# Altium PCB PCB1.PcbDoc
Units mil, origin at the board's own origin, x right, y up, seen from the top; angles counter-clockwise.
Board outline 6000 x 4000 mil, 2 copper layers (Top Layer, Bottom Layer); 22 components, 14 nets, 75 pads, 55 vias.
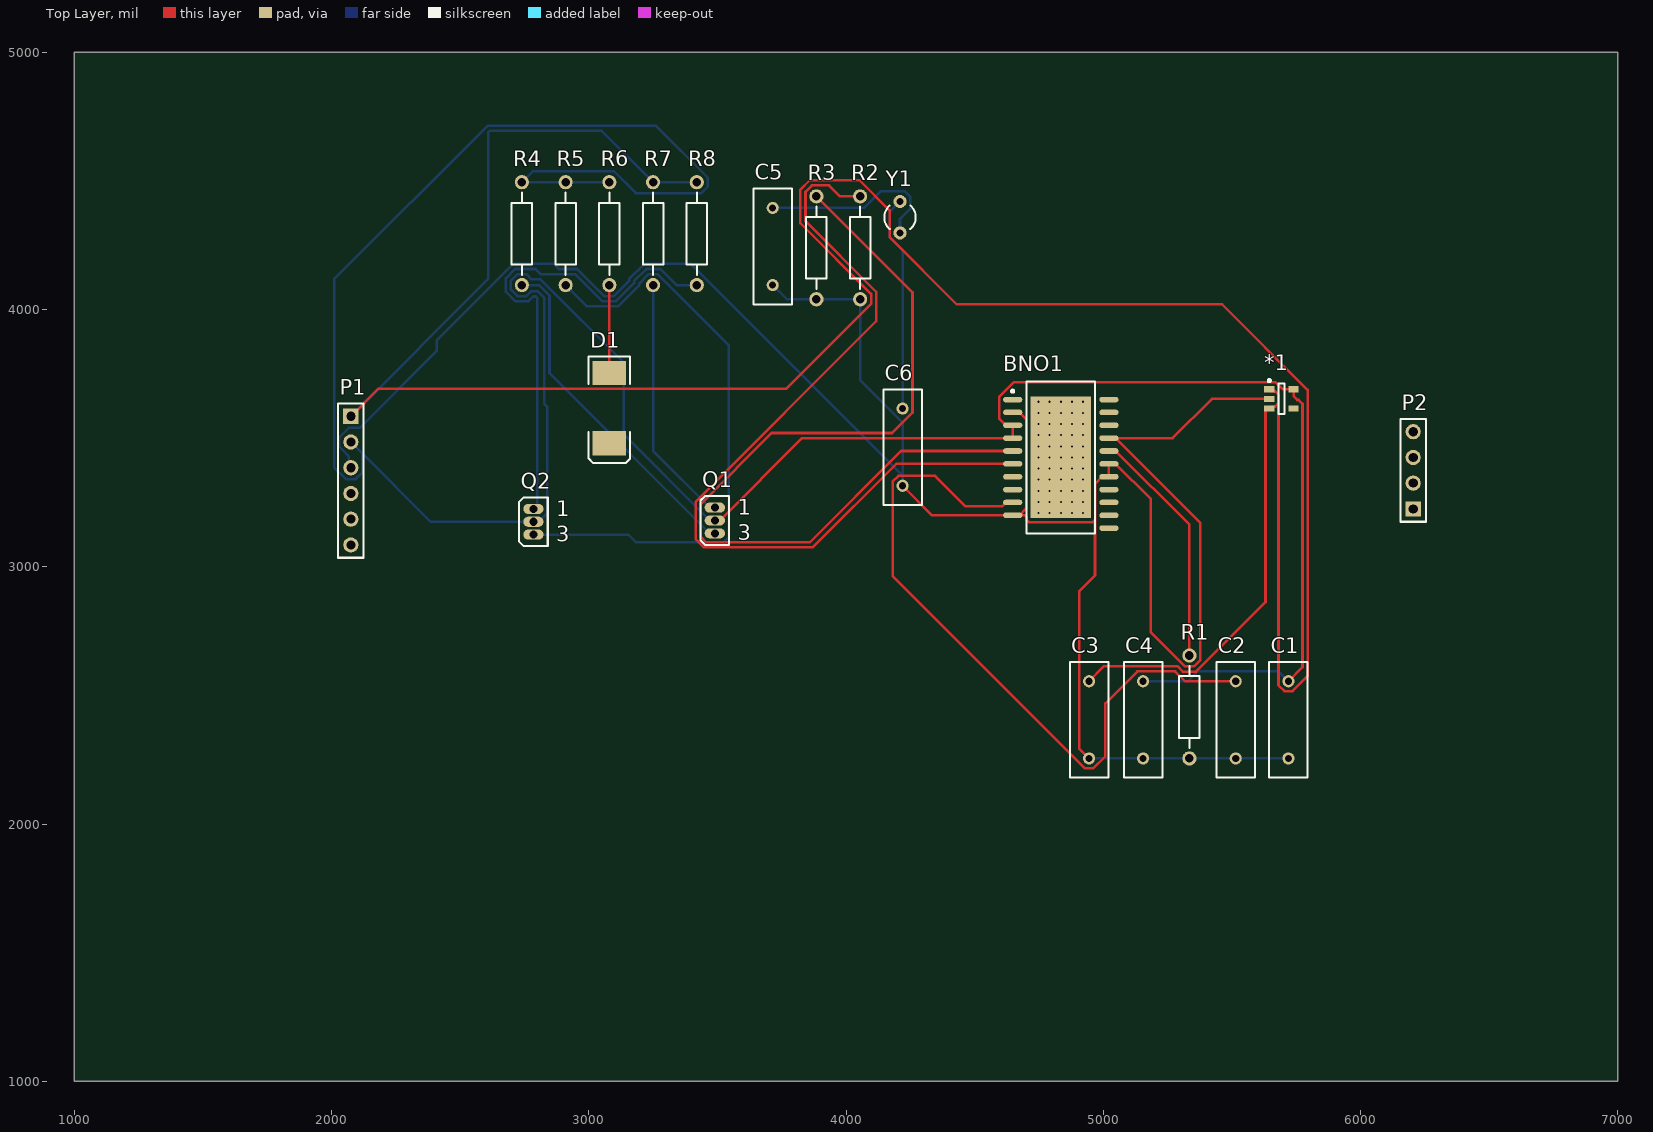
[diagram p0: Top Layer view]
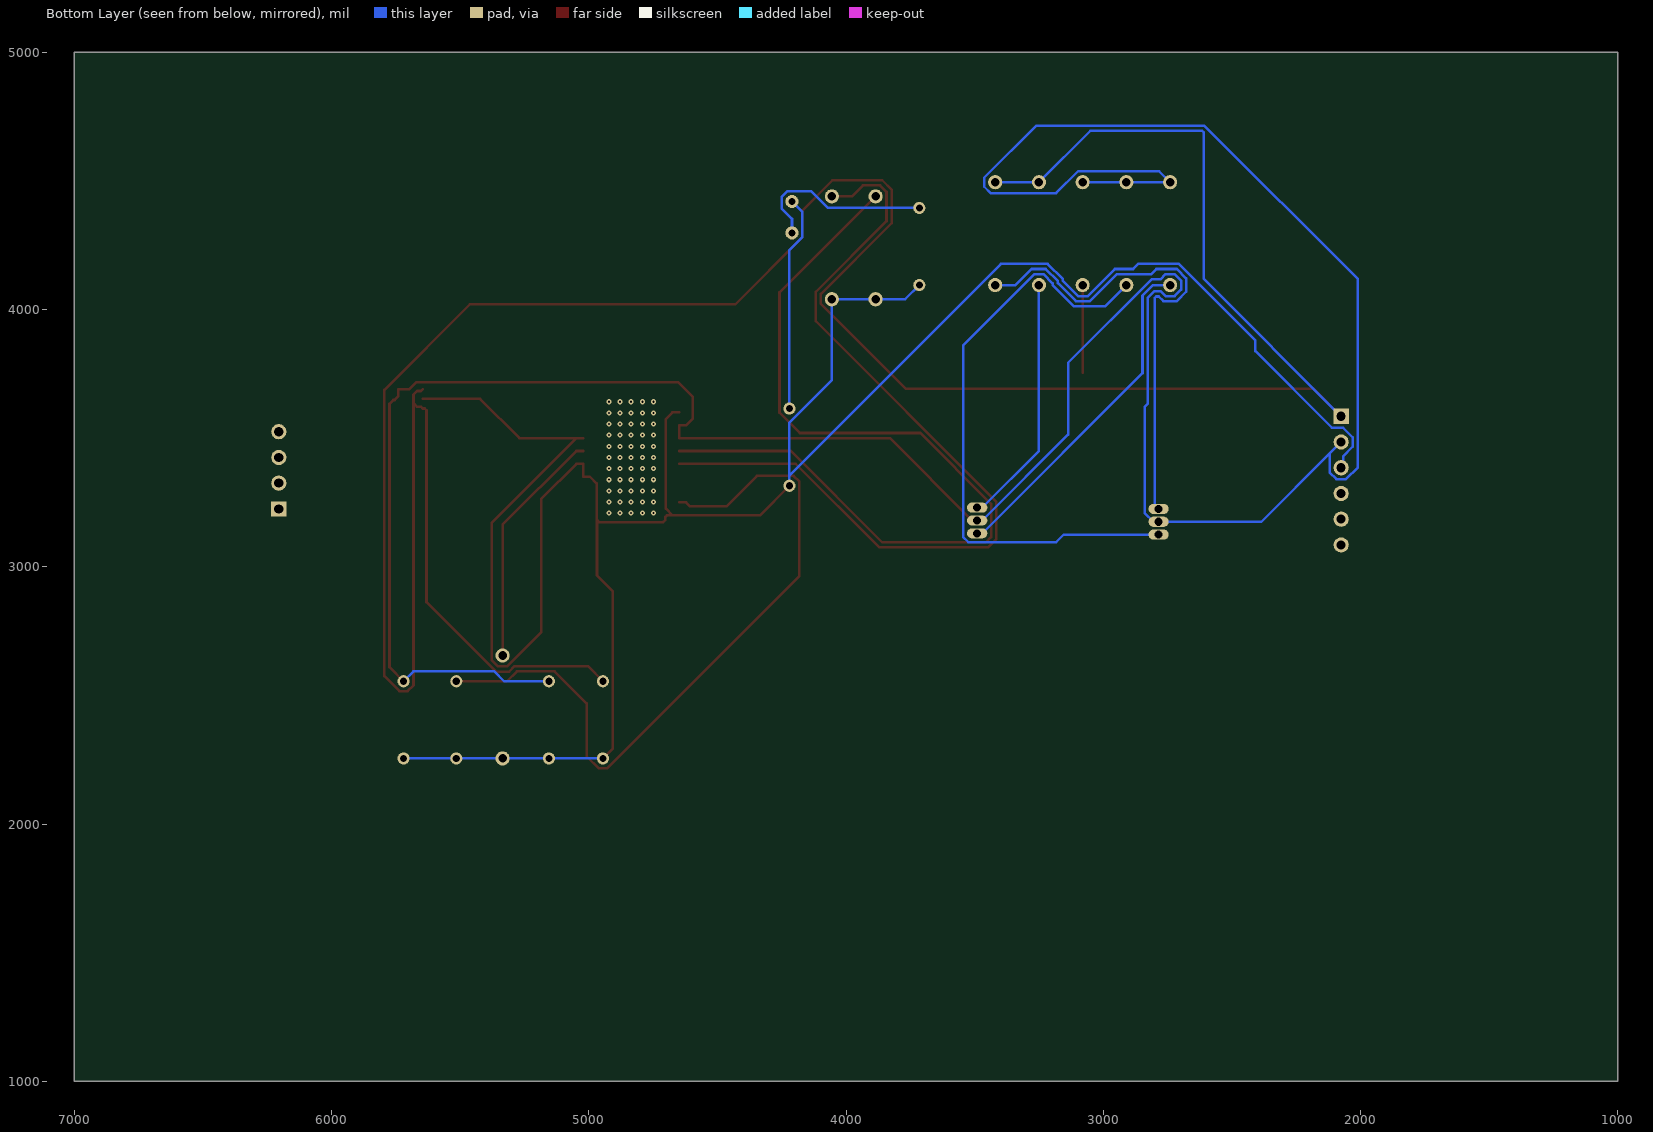
[diagram p1: Bottom Layer view, seen from below]

## Layer stack, top to bottom
Top Solder: solder mask 0.4, Solder Resist, Dk 3.5
Top Layer: signal copper 1.4
Dielectric 1: dielectric 12.6, FR-4, Dk 4.8
Bottom Layer: signal copper 1.4
Bottom Solder: solder mask 0.4, Solder Resist, Dk 3.5

## Board outline
1000,1000 7000,1000 7000,5000 1000,5000

## Design rules (kind name [scope] priority, off if disabled: settings)
Clearance [All] p1: gap=10 ignorepadtopadclearanceinfootprint=FALSE except(0: Arc-Hole Track-Hole SMDPad-Hole THPad-Hole Via-Hole Fill-Hole Poly-Hole Region-Hole Text-Hole)
MinimumSolderMaskSliver [All] p1: minsoldermaskwidth=1
PolygonConnect [All] p1: connectstyle=Relief reliefconductorwidth=10 reliefentries=4 polygonreliefangle="90 Angle" airgapwidth=10
RoutingVias [All] p1: holewidth=28 width=50 viastyle="Through Hole" minholewidth=28 minwidth=50 maxholewidth=28 maxwidth=50
SilkToSolderMaskClearance [IsPad] p1: minsilkscreentomaskgap=5 clearancetoexposedcopper=TRUE
SolderMaskExpansion [All] p1: expansion=4 istentingtop=FALSE
Width [All] p1: maxlimit=10 minlimit=10 preferedwidth=10
28 further rules are at their usual default settings.

## Components (designator, comment, footprint, x,y, rotation, side; value= is the part's Value field where it differs from the comment)
*1 "voltageRegulator" SOT95P245X110-5N 5692.76,3652.6 r0 top
BNO1 "BNO055" SOIC127P980X95_HS-22N 4835,3425 r0 top
C1 "" RAD-0.3 5720,2405 r90 top value=0.1uF
C2 "" RAD-0.3 5515,2405 r90 top value=0.1uF
C3 "" RAD-0.3 4945,2405 r90 top value=10uF
C4 "" RAD-0.3 5155,2405 r90 top value=10uF
C5 "" RAD-0.3 3715,4245 r90 top value=22pF
C6 "" RAD-0.3 4220,3465 r90 top value=22pF
D1 "Diode" SMC 3080,3616.81 r270 top
P1 "Header 6" HDR1X6 2075,3585 r270 top
P2 "Header 4" HDR1X4 6205,3225 r90 top
Q1 "MOSFET-N" E3 3490,3180 r0 top
Q2 "MOSFET-N" E3 2785,3175 r0 top
R1 "" AXIAL-0.4 5335,2455 r90 top value=10K
R2 "" AXIAL-0.4 4055,4240 r90 top value=10K
R3 "" AXIAL-0.4 3885,4240 r90 top value=10K
R4 "" AXIAL-0.4 2740,4295 r90 top value=10K
R5 "" AXIAL-0.4 2910,4295 r90 top value=10K
R6 "" AXIAL-0.4 3080,4295 r90 top value=10K
R7 "" AXIAL-0.4 3250,4295 r90 top value=10K
R8 "" AXIAL-0.4 3420,4295 r90 top value=10K
Y1 "32.768KHz" R38 4210,4358.98 r0 top

## Footprints (in the part's own frame and the unit in brackets; to place one, negate y for a bottom-side part, rotate by r counter-clockwise, add the part's x,y. Pads: shape width x height; smd on the part's side, far side on the other; paste and mask are expansions set on the pad)
AXIAL-0.4 [mm] "Axial Device, Thru-Hole; 2 Leads; 0.4 in Pin Spacing"
  round 1.4 hole 0.85: 1(-5.08,0) 2(5.08,0)
  silkscreen extent -4.06,-1.02 4.06,1.02
E3 [mm] "TO, Flat Index; 3 In-Line, Axial Leads; Body Dia. 4.6mm; Lead Dia. 0.5 mm (max)"
  oval 2x1 hole 0.8: 1(0,1.27) 2(0,0) 3(0,-1.27)
  silkscreen extent -1.41,-2.41 1.41,2.41
HDR1X4 [mm] "Connector; Header; 4 Position"
  rect 1.5x1.5 hole 0.9: 1(0,0)
  round 1.5 hole 0.9: 2(2.54,0) 3(5.08,0) 4(7.62,0)
  silkscreen extent -1.27,-1.27 8.89,1.27
HDR1X6 [mm] "Connector; Header; 6 Position"
  rect 1.5x1.5 hole 0.9: 1(0,0)
  round 1.5 hole 0.9: 2(2.54,0) 3(5.08,0) 4(7.62,0) 5(10.16,0) 6(12.7,0)
  silkscreen extent -1.27,-1.27 13.97,1.27
R38 [mm] "Crystal, Thru-Hole; 2 Leads; Body 3.1 x 8.2 mm (Dia.xH)"
  round 1.3 hole 0.7: 1(0,1.55) 2(0,-1.55)
  silkscreen extent -1.55,-1.19 1.55,1.17
RAD-0.3 [mm] "Radial Cap, Thru-Hole; 2 Leads; 0.3 in Pin Spacing"
  round 1.2 hole 0.7: 1(-3.81,0) 2(3.81,0)
  silkscreen extent -5.71,-1.91 5.71,1.91
SMC [mm] "DO-214-AB/SMC; 2 C-Bend Leads; Body 7.9 x 5.9 mm, inc. leads (LxW)"
  rect 2.4x3.3 smd: 1(-3.475,0) 2(3.475,0)
  silkscreen extent -5.07,-2.05 5.43,2.05
SOIC127P980X95_HS-22N [mm] "SOIC, 21-Leads, Body 13.50x7.30mm, Pitch 1.27mm, Thermal Pad 12.00x6.00mm, IPC Medium Density"
  oval 1.9x0.55 smd: 1(-4.75,5.715) 2(-4.75,4.445) 3(-4.75,3.175) 4(-4.75,1.905) 5(-4.75,0.635) 6(-4.75,-0.635) 7(-4.75,-1.905) 8(-4.75,-3.175) 9(-4.75,-4.445) 10(-4.75,-5.715) 11(4.75,-6.985) 12(4.75,-5.715) 13(4.75,-4.445) 14(4.75,-3.175) 15(4.75,-1.905) 16(4.75,-0.635) 17(4.75,0.635) 18(4.75,1.905) 19(4.75,3.175) 20(4.75,4.445) 21(4.75,5.715)
  rect 6x12 smd: 22(0,0)
  silkscreen extent -4.87,-7.5 3.4,7.5, body extent -4.91,-7.5 4.91,7.5, height 1.05
SOT95P245X110-5N [mm] "SOT23, 5-Leads, Body 2.90x2.45mm, Pitch 0.95mm, IPC Medium Density"
  rect 1x0.6 smd: 1(-1.2,0.95) 2(-1.2,0) 3(-1.2,-0.95) 4(1.2,-0.95) 5(1.2,0.95)
  silkscreen extent -1.32,-1.5 0.3,1.92, body extent -1.3,-1.5 1.3,1.5, height 1.1

## Part data
C1 C2 C3 C4 C5 C6: library part Cap, "Capacitor", LatestRevisionDate=17-Jul-2002, LatestRevisionNote="Re-released for DXP Platform.", PackageDescription="Radial Cap, Thru-Hole; 2 Leads; 0.3 in Pin Spacing", PackageReference=RAD-0.3, Published=8-Jun-2000, Publisher="Altium Limited"
D1: "Default Diode", Code_JEDEC=DO-214-AB, LatestRevisionDate=17-Jul-2002, LatestRevisionNote="Re-released for DXP Platform.", PackageDescription="DO-214-AB/SMC; 2 C-Bend Leads; Body 7.9 x 5.9 mm, inc. leads (LxW)", PackageReference=SMC, PackageVersion=Sep-1996, Published=8-Jun-2000, Publisher="Altium Limited"
P1: "Header, 6-Pin", LatestRevisionDate=17-Jul-2002, LatestRevisionNote="Re-released for DXP Platform.", Publisher="Altium Limited"
P2: "Header, 4-Pin", LatestRevisionDate=17-Jul-2002, LatestRevisionNote="Re-released for DXP Platform.", Publisher="Altium Limited"
Q1 Q2: "N-Channel MOSFET", LatestRevisionDate=17-Jul-2002, LatestRevisionNote="Re-released for DXP Platform.", PackageDescription="TO, Flat Index; 3 In-Line, Axial Leads; Body Dia. 4.6mm; Lead Dia. 0.5 mm (max)", PackageReference=E3, PackageVersion=1995/1996, Published=8-Jun-2000, Publisher="Altium Limited"
R1 R2 R3 R4 R5 R6 R7 R8: library part Res2, "Resistor", LatestRevisionDate=17-Jul-2002, LatestRevisionNote="Re-released for DXP Platform.", PackageDescription="Axial Device, Thru-Hole; 2 Leads; 0.4 in Pin Spacing", PackageReference=AXIAL-0.4, Published=8-Jun-2000, Publisher="Altium Limited"
Y1: library part XTAL, "Crystal Oscillator", LatestRevisionDate=17-Jul-2002, LatestRevisionNote="Re-released for DXP Platform.", PackageDescription="Crystal, Thru-Hole; 2 Leads; Body 3.1 x 8.2 mm (Dia.xH)", PackageReference=R38, Published=8-Jun-2000, Publisher="Altium Limited"

## Via types
v1: diameter 19.68, hole 7.87, Top Layer to Bottom Layer, 55 vias

## Nets (pads, with @x,y where several pads share a name; then routed paths per layer and width w, separated by ;. In a path a pad name is that pad's centre, name@x,y a point inside that pad or via, vN(x,y) a via of type N, cw(c..) or ccw(c..) an arc to the next point about the centre after c; other vN are vias at no path point)
3.3V: *1.5 BNO1.3 BNO1.4 C1.2 C4.2 P1.2 Q1.2 Q2.2 R4.2 R5.2 R6.2 | length 11632
  Top Layer w10: Q1.2 3509.68,3180 3829.68,3500 BNO1.4 BNO1.3 4621.42,3550 4595.59,3575.83 4595.59,3660.7 4651.7,3716.81 5671.41,3716.81 5698.22,3690 *1.5 5740,3663.19 5754.98,3648.2 5759.7,3648.2 5774.69,3633.22 5774.69,2609.69 C1.2
  Bottom Layer w10: P1.2 2119.53,3440.47 ; R6.2 R5.2 R4.2 2782.56,4537.56 3097.63,4537.56 3182.75,4452.44 3437.63,4452.44 3462.56,4477.37 3462.56,4512.63 3260.19,4715 2607.57,4715 2010.47,4117.9 2010.47,3386.56 2056.56,3340.47 2093.44,3340.47 2119.53,3366.56 2119.53,3440.47 ; Q1.2 3470.32,3180 3136.29,3514.03 3136.29,3793.12 2811.85,4117.56 2777.63,4117.56 2757.63,4137.56 2722.37,4137.56 2697.44,4112.63 2697.44,4077.37 2722.37,4052.44 2757.63,4052.44 2775.92,4070.73 2802.11,4070.73 2827.44,4045.4 2827.44,3633.51 2839.37,3621.58 2839.37,3209.69 2804.68,3175 2385,3175 2119.53,3440.47 ; C4.2 5328.73,2555 5367.35,2593.62 5681.38,2593.62 C1.2
+5: *1.1 *1.3 C3.2 P1.1 R7.2 R8.2 | length 11440
  Top Layer w10: P1.1 2181.38,3691.38 3766.57,3691.38 4097.56,4022.37 4097.56,4060.26 3822.44,4335.38 3822.44,4465.91 3859.09,4502.56 4052.63,4502.56 4169.41,4385.78 4169.41,4281.14 4430.04,4020.51 5462.2,4020.51 5794.69,3688.02 5794.69,2575.07 5736,2516.38 5704,2516.38 5681.38,2539 5681.38,3634.57 5681.38,3669.44 5667.63,3683.19 5652.32,3683.19 *1.1 ; C3.2 5003.62,2613.62 5287.91,2613.62 5309.09,2592.44 5360.91,2592.44 5630.83,2862.35 5630.83,3608.39 5637.64,3615.2 *1.3 5652.32,3622.01 5667.63,3622.01 5680.2,3634.57
  Bottom Layer w10: P1.1 2610,4120 2610,4689.14 2615.86,4695 3050,4695 R7.2 R8.2
GND: *1.2 BNO1.2 BNO1.10 BNO1.15 BNO1.16 BNO1.18 C1.1 C2.1 C3.1 C4.1 C5.1 C6.1 P1.3 R1.1 R2.1 R3.1 | length 10180.8
  Top Layer w10: C6.1 4335,3200 BNO1.10 BNO1.10@4674.57,3200 ; BNO1.2 4674.57,3600 4700.39,3574.17 4700.39,3225.83 BNO1.10@4674.57,3200 ; C3.1 4906.38,2293.62 4906.38,2904.35 4968.11,2966.08 4968.11,3182.57 ; BNO1.18 BNO1.18@5048.58,3500 ; *1.2 5422.1,3652.6 5269.5,3500 BNO1.18@5048.58,3500 ; BNO1.10@4674.57,3200 4696.03,3200 4701.89,3194.14 4701.89,3182.57 4710.68,3173.78 4959.32,3173.78 4968.11,3182.57 ; 4968.11,3182.57 4969.61,3184.06 4969.61,3324.17 4995.43,3350 BNO1.15 BNO1.16 5048.58,3400 5184.09,3264.49 5184.09,2745.72 5317.37,2612.44 5352.63,2612.44 5377.56,2637.37 5377.56,3171.02 BNO1.18@5048.58,3500
  Bottom Layer w10: P1.3 2067.5,3392.5 2067.5,3429.53 2030.47,3466.56 2030.47,3503.44 2067.5,3540.47 2110.74,3540.47 2408.27,3838 2408.27,3880.03 2705.8,4177.56 2864.09,4177.56 2884.09,4157.56 2954.87,4157.56 3059.99,4052.44 3097.63,4052.44 3156.72,4111.53 3156.72,4118.47 3215.8,4177.56 3397.63,4177.56 4220,3355.19 ; C5.1 3770,4040 R3.1 R2.1 4055,3725.38 4220,3560.38 4220,3355.19 ; C6.1 4220,3355.19 ; C3.1 C4.1 R1.1 C2.1 C1.1
NetBNO1_5: BNO1.5 R3.2 | length 3462.1
  Top Layer w10: R3.2 4258.62,4066.38 4258.62,3599 4179.62,3520 3711.26,3520 3435.63,3244.37 3435.63,3115.63 3455.95,3095.32 3859.76,3095.32 4214.45,3450 BNO1.5
NetBNO1_6: BNO1.6 R2.2 | length 3375.6
  Top Layer w10: R2.2 3976.36,4440 3933.8,4482.56 3867.37,4482.56 3842.44,4457.63 3842.44,4343.66 4117.56,4068.55 4117.56,3954.58 3415.63,3252.65 3415.63,3107.35 3447.66,3075.32 3870.62,3075.32 4195.31,3400 BNO1.6
NetBNO1_9: BNO1.9 C2.2 | length 2834.5
  Top Layer w10: BNO1.9 4621.42,3250 4606.42,3235 4464.52,3235 4345.9,3353.62 4204,3353.62 4181.38,3331 4181.38,2964 4929,2216.38 4961,2216.38 5008.04,2263.42 5008.04,2469.33 5132.34,2593.62 5279.62,2593.62 5318.24,2555 C2.2
NetBNO1_17: BNO1.17 R1.2 | length 940.2
  Top Layer w10: BNO1.17 5048.58,3450 5335,3163.58 R1.2
NetBNO1_26: C6.2 Y1.1 | length 842.8
  Bottom Layer w10: Y1.1 4169.41,4379.41 4169.41,4281.14 4220,4230.55 C6.2
NetBNO1_27: C5.2 Y1.2 | length 728.3
  Bottom Layer w10: C5.2 4070.19,4395 4135.78,4460.59 4226.81,4460.59 4250.59,4436.81 4250.59,4393.25 4210,4352.66 Y1.2
NetD1_1: D1.1 R6.1 | length 341.4
  Top Layer w10: D1.1 R6.1
NetQ1_1: Q1.1 R7.1 | length 975.9
  Bottom Layer w10: R7.1 3250,3450.32 3470.32,3230 Q1.1
NetQ1_3: Q1.3 R4.1 | length 1325.9
  Bottom Layer w10: R4.1 2806.13,4095 2847.44,4053.69 2847.44,3752.87 3470.32,3130 Q1.3
NetQ2_1: Q2.1 R8.1 | length 1917.2
  Bottom Layer w10: Q2.1 2786.12,3225 2799.68,3238.57 2799.68,4044.87 2793.83,4050.73 2784.2,4050.73 2765.91,4032.44 2714.09,4032.44 2677.44,4069.09 2677.44,4120.91 2714.09,4157.56 2793.23,4157.56 2813.23,4137.56 2946.58,4137.56 3051.7,4032.44 3105.91,4032.44 3176.72,4103.24 3176.72,4110.19 3224.09,4157.56 3278.8,4157.56 3341.36,4095 R8.1
NetQ2_3: Q2.3 R5.1 | length 2364.4
  Bottom Layer w10: Q2.3 3153.5,3125 3183.18,3095.32 3524.05,3095.32 3544.37,3115.63 3544.37,3860.82 3267.63,4137.56 3232.37,4137.56 3196.72,4101.9 3196.72,4094.96 3114.2,4012.44 2992.56,4012.44 R5.1
pads on no net: *1.4 BNO1.1 BNO1.7 BNO1.8 BNO1.11 BNO1.12 BNO1.13 BNO1.14 BNO1.19 BNO1.20 BNO1.21 BNO1.22 D1.2 P1.4 P1.5 P1.6 P2.1 P2.2 P2.3 P2.4
copper on no net:
  other v1: 4748.39,3208.46 4791.69,3208.46 4835,3208.46 4878.31,3208.46 4921.61,3208.46 4748.39,3251.77 4791.69,3251.77 4835,3251.77 4878.31,3251.77 4921.61,3251.77 4748.39,3295.08 4791.69,3295.08 4835,3295.08 4878.31,3295.08 4921.61,3295.08 4748.39,3338.39 4791.69,3338.39 4835,3338.39 4878.31,3338.39 4921.61,3338.39 4748.39,3381.69 4791.69,3381.69 4835,3381.69 4878.31,3381.69 4921.61,3381.69 4748.39,3425 4791.69,3425 4835,3425 4878.31,3425 4921.61,3425 4748.39,3468.31 4791.69,3468.31 4835,3468.31 4878.31,3468.31 4921.61,3468.31 4748.39,3511.61 4791.69,3511.61 4835,3511.61 4878.31,3511.61 4921.61,3511.61 4748.39,3554.92 4791.69,3554.92 4835,3554.92 4878.31,3554.92 4921.61,3554.92 4748.39,3598.23 4791.69,3598.23 4835,3598.23 4878.31,3598.23 4921.61,3598.23 4748.39,3641.54 4791.69,3641.54 4835,3641.54 4878.31,3641.54 4921.61,3641.54

## Text inside footprints (layer, text, board x,y; h text height)
Q1: Top Overlay "1" at 3579.57,3201.85 h59.05; Top Overlay "3" at 3579.57,3102.72 h59.05
Q2: Top Overlay "1" at 2874.57,3196.85 h59.05; Top Overlay "3" at 2874.57,3097.72 h59.05